# EAGLE board TNP Schematic (EAGLE 7.6.0)
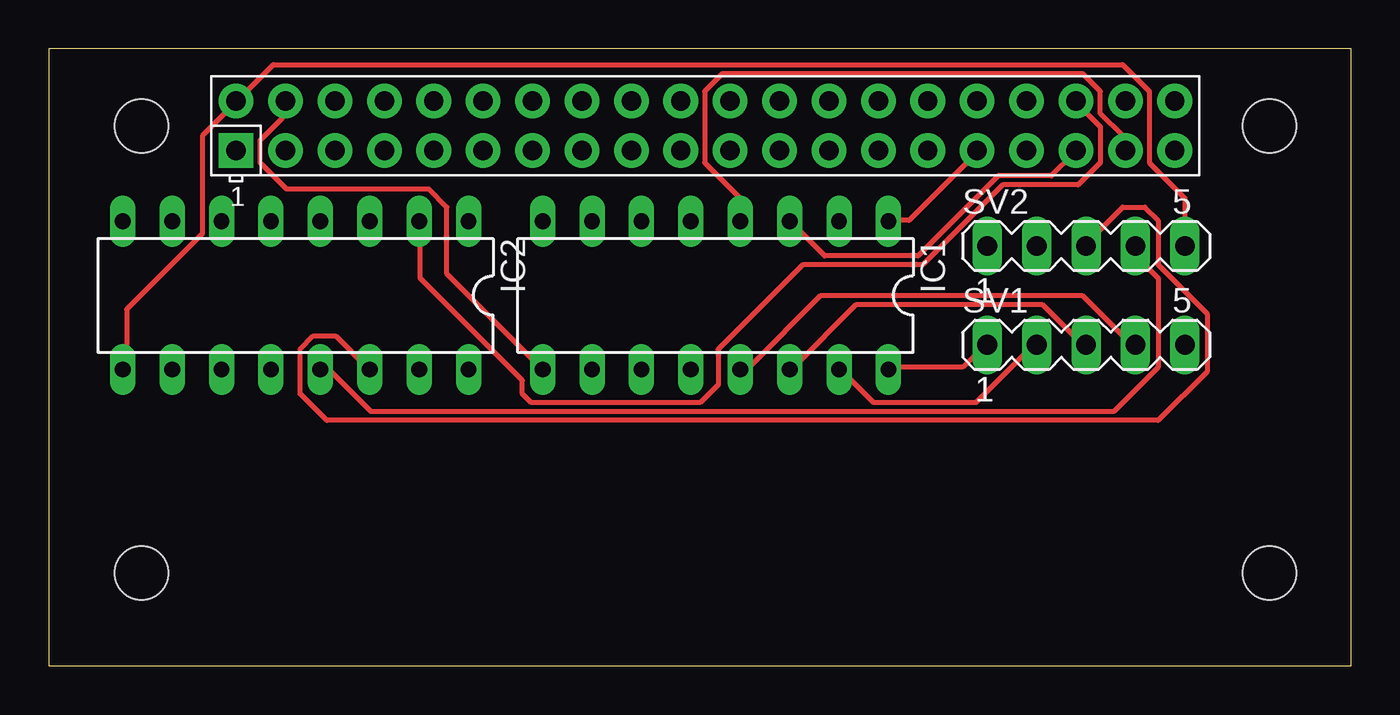
[diagram p0: board, top side]
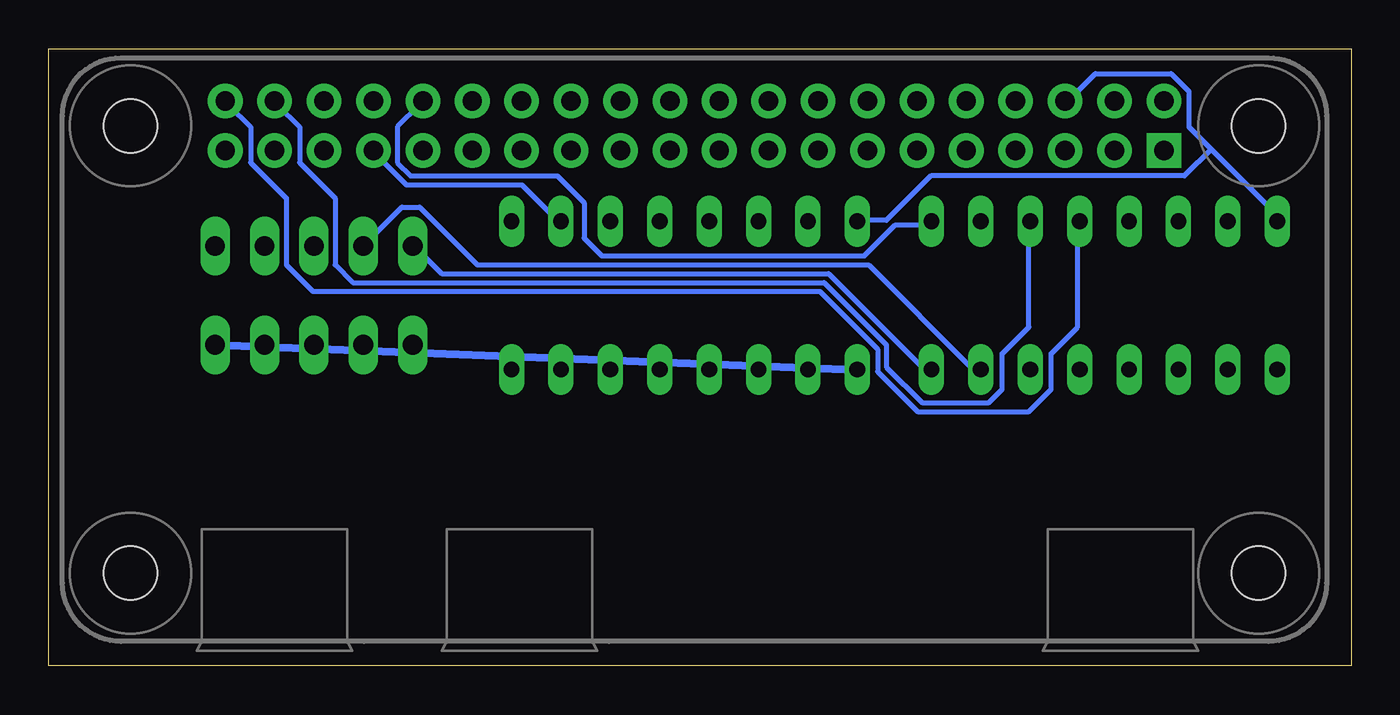
[diagram p1: board, bottom side, seen from below]

Size 66.98 x 31.74 mm. Coordinates in mm from the lower left corner, seen from the top.
Outline: 0,0 66.98,0 66.98,31.74 0,31.74 0,0
Copper layers (1*16): Top 0.035mm / dielectric 1.5mm / Bottom 0.035mm
Design rules "default": minimum track width 10mil, minimum drill 24mil, track to track 8mil, track to pad 8mil, pad to pad 8mil, via to via 8mil, smd to smd 8mil, copper to edge 40mil, drill to drill 8mil, minimum pad ring 10mil, minimum via ring 8mil, stop-mask expansion 4mil, vias tented up to drill 0mil, thermal gap 10mil

## Footprints (pad centres in the part's own frame; a part is rotated, then mirrored left to right if it is on the bottom)
DIL16 = drill 0.813 long: 1 -8.89,-3.81; 2 -6.35,-3.81; 3 -3.81,-3.81; 4 -1.27,-3.81; 5 1.27,-3.81; 6 3.81,-3.81; 7 6.35,-3.81; 8 8.89,-3.81; 9 8.89,3.81; 10 6.35,3.81; 11 3.81,3.81; 12 1.27,3.81; 13 -1.27,3.81; 14 -3.81,3.81; 15 -6.35,3.81; 16 -8.89,3.81
MA05-1 = drill 1.016 long: 1 -5.08,0; 2 -2.54,0; 3 0,0; 4 2.54,0; 5 5.08,0
RASPBERRYPI_BASTELSTUBE_V13_RASPI_BOARD_B+_FULL = drill 1 pad 1.778 square: 1 8.37,25.23 | drill 1 pad 1.778: 2 8.37,27.77; 3 10.91,25.23; 4 10.91,27.77; 5 13.45,25.23; 6 13.45,27.77; 7 15.99,25.23; 8 15.99,27.77; 9 18.53,25.23; 10 18.53,27.77; 11 21.07,25.23; 12 21.07,27.77; 13 23.61,25.23; 14 23.61,27.77; 15 26.15,25.23; 16 26.15,27.77; 17 28.69,25.23; 18 28.69,27.77; 19 31.23,25.23; 20 31.23,27.77; 21 33.77,25.23; 22 33.77,27.77; 23 36.31,25.23; 24 36.31,27.77; 25 38.85,25.23; 26 38.85,27.77; 27 41.39,25.23; 28 41.39,27.77; 29 43.93,25.23; 30 43.93,27.77; 31 46.47,25.23; 32 46.47,27.77; 33 49.01,25.23; 34 49.01,27.77; 35 51.55,25.23; 36 51.55,27.77; 37 54.09,25.23; 38 54.09,27.77; 39 56.63,25.23; 40 56.63,27.77 | hole 2.75: 3.5,3.5; 3.5,26.5; 61.5,3.5; 61.5,26.5

## Placement (x,y rotation side)
IC1  ULN2003AN  [DIL16]  34.29,19.05 180 top
IC2  ULN2003AN  [DIL16]  12.7,19.05 180 top
SV1  [MA05-1]  53.34,16.51 0 top
SV2  [MA05-1]  53.34,21.59 0 top
U$1  RPI-ZERO  [RASPBERRYPI_BASTELSTUBE_V13_RASPI_BOARD_B+_FULL]  1.27,1.27 0 top

## Library data of the parts
IC1 IC2 = uln-udn
SV1 SV2 = con-lstb; OC_FARNELL: unknown; OC_NEWARK: unknown
U$1 = RPI-Zero

## Nets
5V0@1: IC2.9 SV2.5 U$1.2
5V0@2: IC1.9 SV1.5 U$1.4
GND@8: IC1.8 IC2.8 U$1.6
N$1: IC1.16 SV1.1
N$2: IC1.15 SV1.2
N$3: IC1.14 SV1.3
N$4: IC1.13 SV1.4
N$5: IC2.16 SV2.1
N$6: IC2.15 SV2.2
N$7: IC2.14 SV2.3
N$8: IC2.13 SV2.4
N$9: IC2.4 U$1.40
N$10: IC2.3 U$1.38
N$11: IC2.2 U$1.36
N$12: IC1.1 U$1.31
N$13: IC1.2 U$1.33
N$14: IC1.3 U$1.35
N$15: IC1.4 U$1.37
N$17: IC2.1 U$1.32

## Tracks (layer width: path | path; a pad name or v marks a point on that pad's centre or on a via)
5V0@1
  Top 0.254: IC2.9 4.01,15.37 4.01,18.34 7.9,22.23 7.9,27.25 9.5,28.85 U$1.2 9.73,29.08 11.56,30.91 55.22,30.91 56.59,29.54 56.59,25.88 58.42,24.05 SV2.5
5V0@2
  Top 0.254: IC1.9 20.47,20.17 20.47,23.6 19.56,24.51 12.24,24.51 10.87,25.88 10.87,27.03 12.01,28.17 12.01,28.85 U$1.4
  Bottom 0.406: SV1.5 IC1.9
GND@8
  Bottom 0.254: 7.21,26.57 8.36,27.71 8.36,29.54 9.27,30.46 13.16,30.46 14.53,29.08 U$1.6 | 7.21,26.57 4.01,23.37 4.01,22.91 IC2.8 | 7.21,26.57 8.58,25.2 21.61,25.2 23.9,22.91 25.27,22.91 IC1.8
N$1
  Top 0.254: IC1.16 43.33,15.37 46.99,15.37 48.13,16.51 SV1.1
N$2
  Top 0.254: IC1.15 40.82,15.14 42.42,13.54 47.68,13.54 50.65,16.51 SV1.2
N$3
  Top 0.254: IC1.14 38.3,15.37 41.5,18.57 51.1,18.57 53.16,16.51 SV1.3
N$4
  Top 0.254: IC1.13 35.56,15.37 36.02,15.37 39.67,19.02 53.16,19.02 55.68,16.51 SV1.4
N$5
  Bottom 0.254: IC2.16 21.61,15.37 22.07,15.37 26.87,20.17 46.76,20.17 48.13,21.54 SV2.1
N$6
  Bottom 0.254: IC2.15 19.1,15.37 19.56,15.37 24.82,20.63 44.93,20.63 47.9,23.6 48.82,23.6 50.65,21.77 SV2.2
N$7
  Top 0.254: IC2.14 16.36,15.37 14.76,16.97 13.61,16.97 12.93,16.28 12.93,14 14.3,12.62 57.05,12.62 59.56,15.14 59.56,18.11 57.05,20.63 57.05,22.91 56.36,23.6 55.22,23.6 53.39,21.77 SV2.3
N$8
  Top 0.254: IC2.13 14.07,15.14 14.53,15.14 16.59,13.08 54.76,13.08 57.05,15.37 57.05,19.94 55.9,21.08 55.9,21.54 SV2.4
N$9
  Bottom 0.254: IC2.4 14.07,22.68 14.07,17.42 15.44,16.05 15.44,14.22 16.59,13.08 22.3,13.08 24.36,15.14 24.36,16.28 27.33,19.25 53.39,19.25 54.76,20.63 54.76,24.05 56.59,25.88 56.59,27.71 57.73,28.85 U$1.40
N$10
  Bottom 0.254: IC2.3 16.59,22.68 16.59,17.42 17.96,16.05 17.96,14.22 18.64,13.54 22.07,13.54 23.9,15.37 23.9,16.51 27.1,19.71 51.33,19.71 52.25,20.63 52.25,24.05 54.08,25.88 54.08,27.71 55.22,28.85 U$1.38
N$11
  Top 0.254: IC2.2 19.1,22.68 19.1,19.94 24.36,14.68 24.36,14 24.82,13.54 33.5,13.54 34.42,14.45 34.42,16.28 38.76,20.63 44.93,20.63 49.05,24.74 52.93,24.74 54.08,25.88 54.08,27.71 52.93,28.85 U$1.36
N$12
  Top 0.254: IC1.1 43.33,22.91 44.25,22.91 47.68,26.34 U$1.31
N$13
  Bottom 0.254: IC1.2 40.82,22.91 42.65,24.74 48.59,24.74 50.19,26.34 U$1.33
N$14
  Top 0.254: IC1.3 38.3,22.68 39.9,21.08 44.7,21.08 48.82,25.2 51.56,25.2 52.7,26.34 U$1.35
N$15
  Top 0.254: IC1.4 35.56,24.05 33.73,25.88 33.73,29.54 34.65,30.46 53.16,30.46 54.08,29.54 54.08,28.4 55.22,27.25 55.22,26.57 U$1.37
N$17
  Bottom 0.254: IC2.1 21.61,22.68 23.44,22.68 25.04,21.08 38.53,21.08 39.45,22 39.45,23.82 40.82,25.2 48.36,25.2 49.05,25.88 49.05,27.71 47.9,28.85 U$1.32